# Altium PCB Power_Managment.PcbDoc (part 1 of 2)
Units mm, origin at the board's own origin, x right, y up, seen from the top; angles counter-clockwise.
Board outline 140 x 113 mm, 2 copper layers (Top Layer, Bottom Layer); 140 components, 107 nets, 489 pads, 1171 vias.
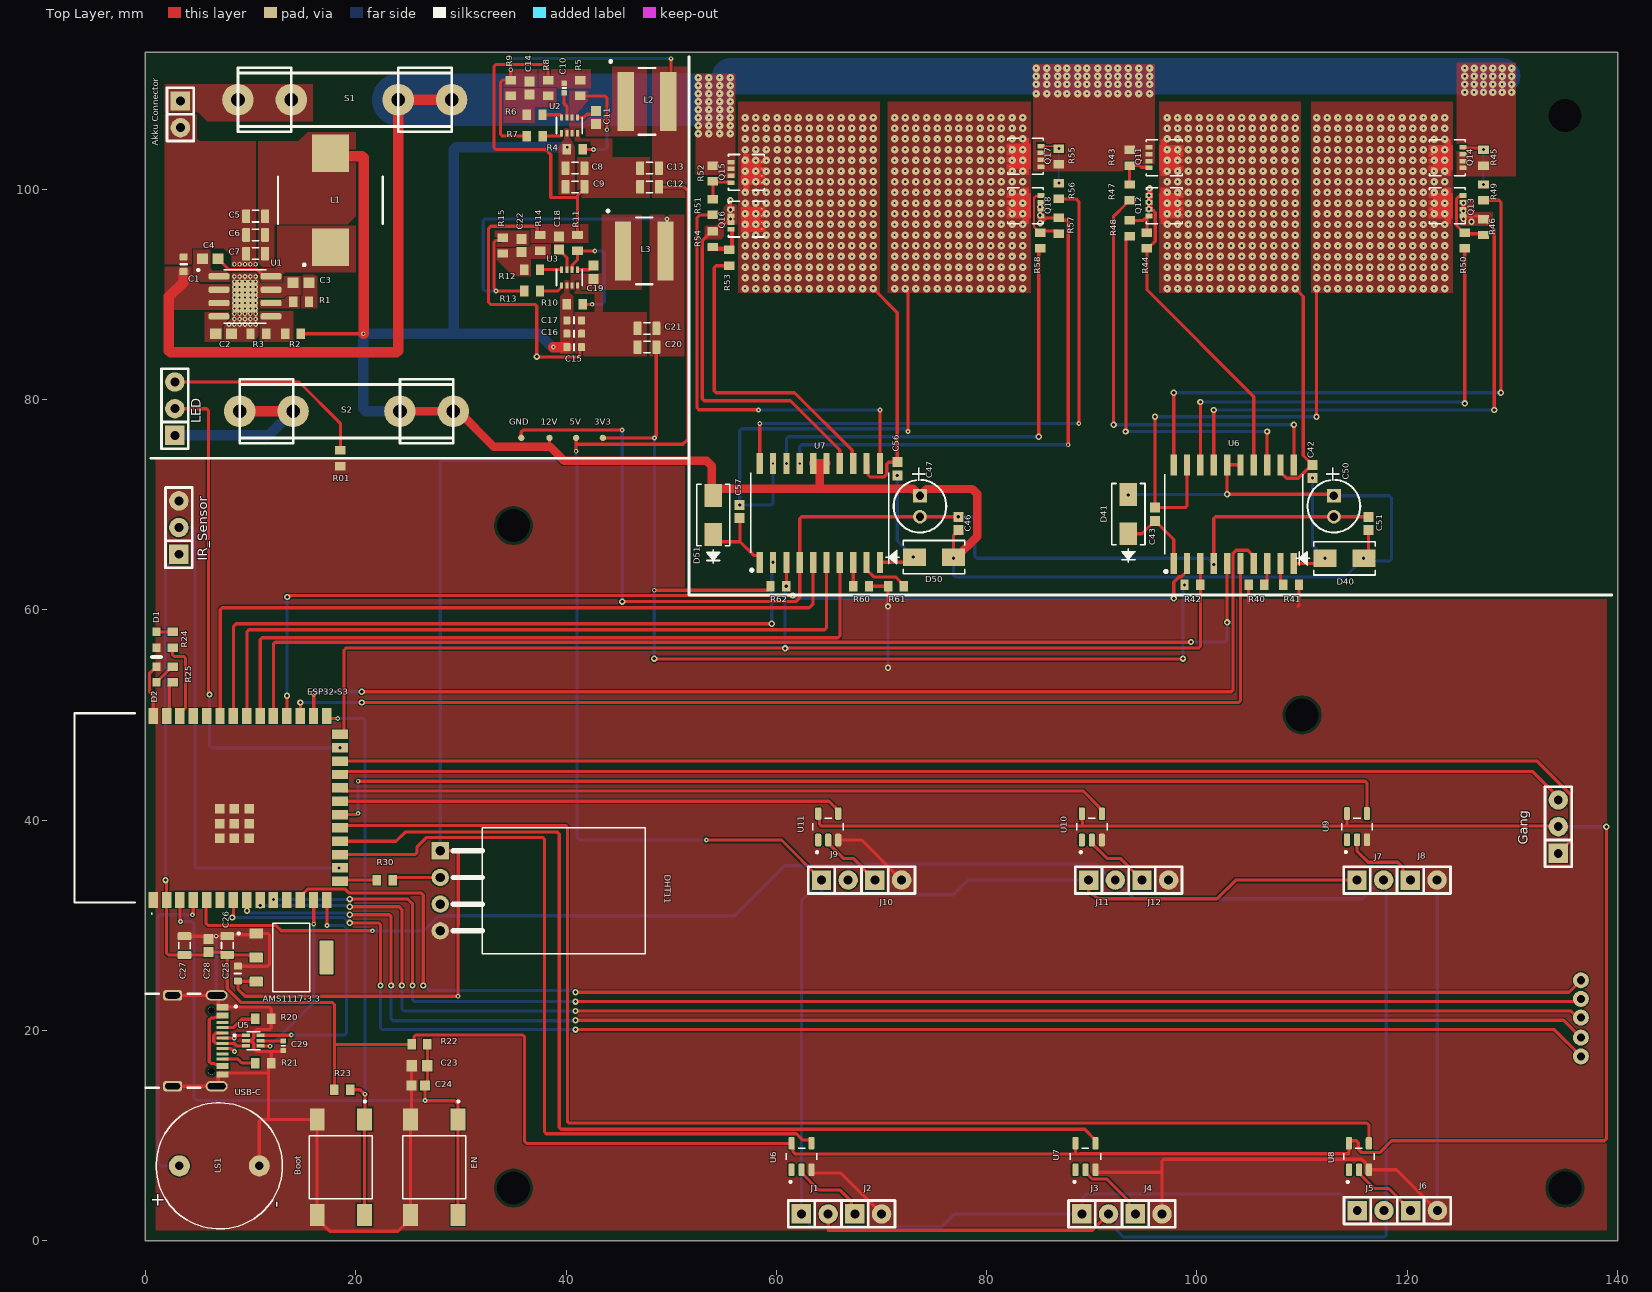
[diagram p0: Top Layer view]
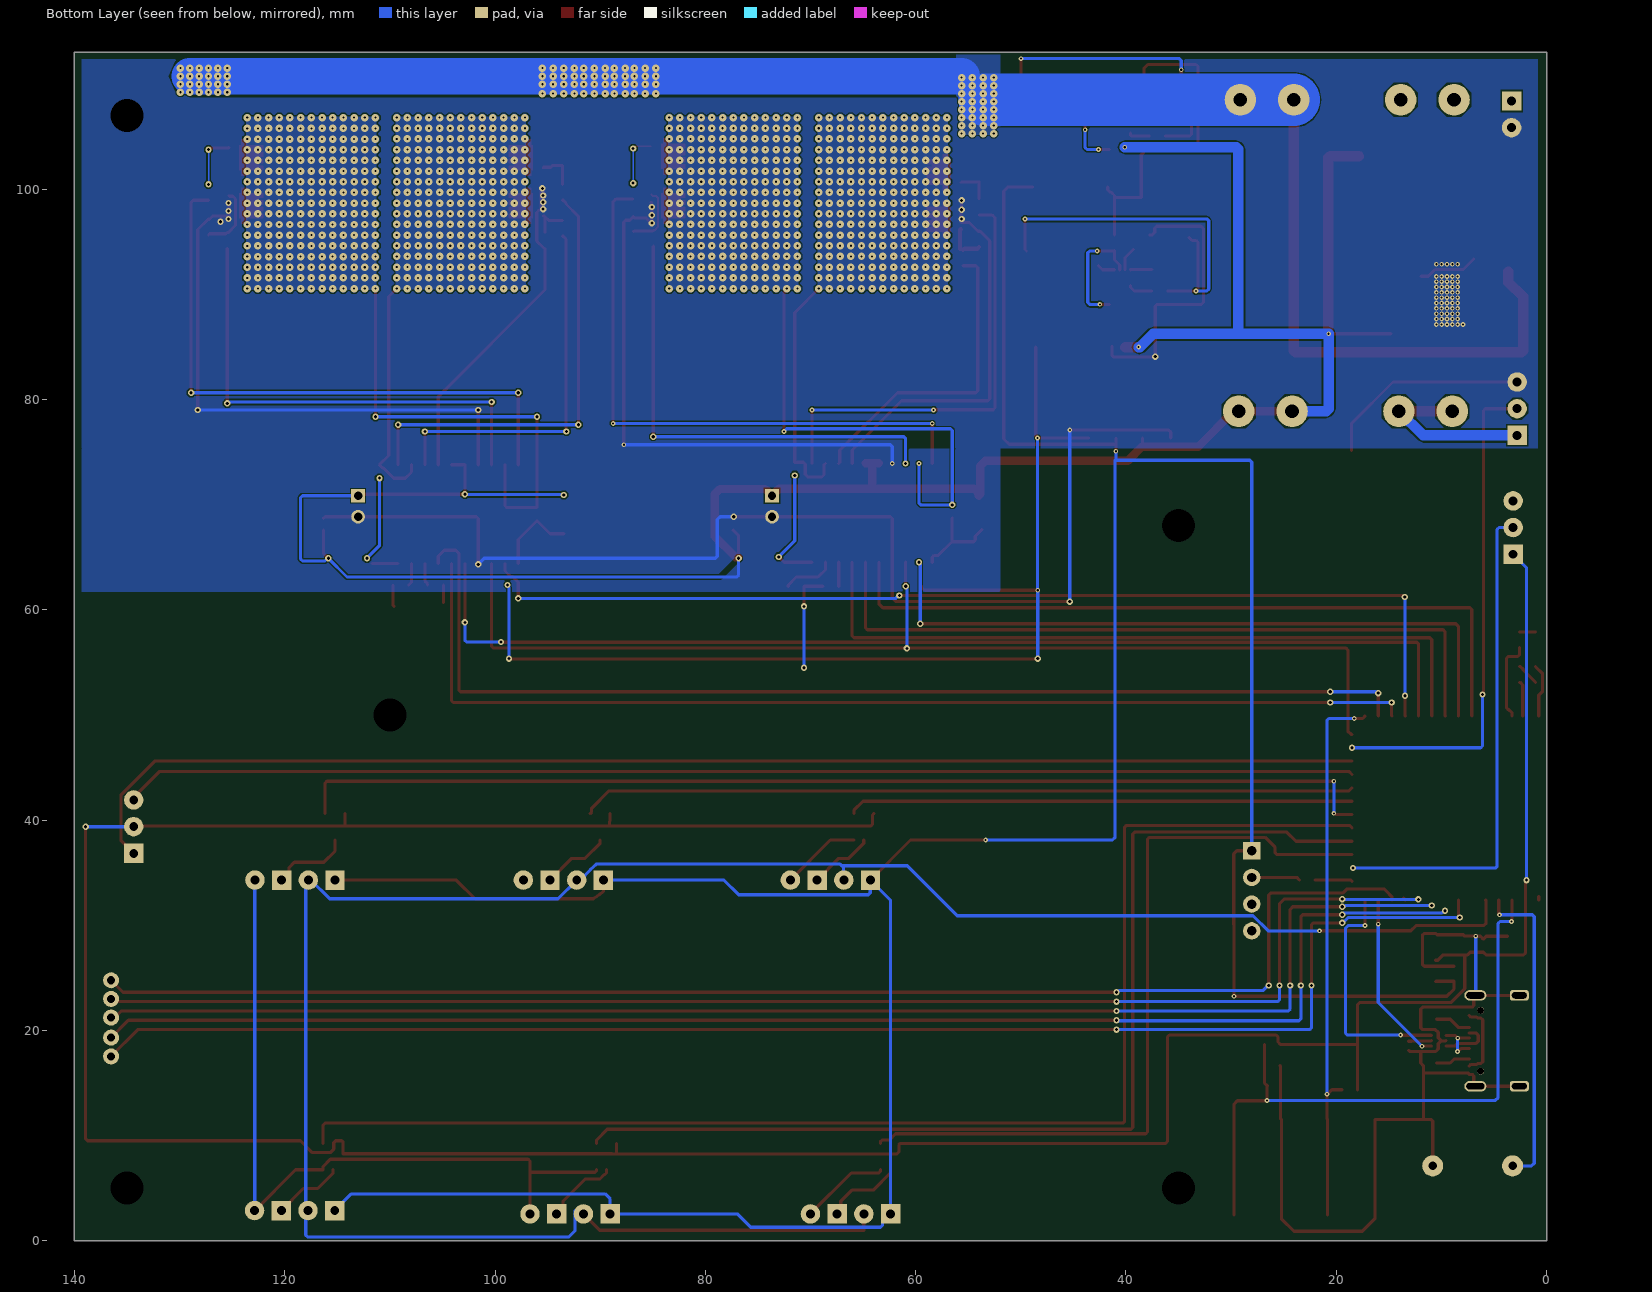
[diagram p1: Bottom Layer view, seen from below]
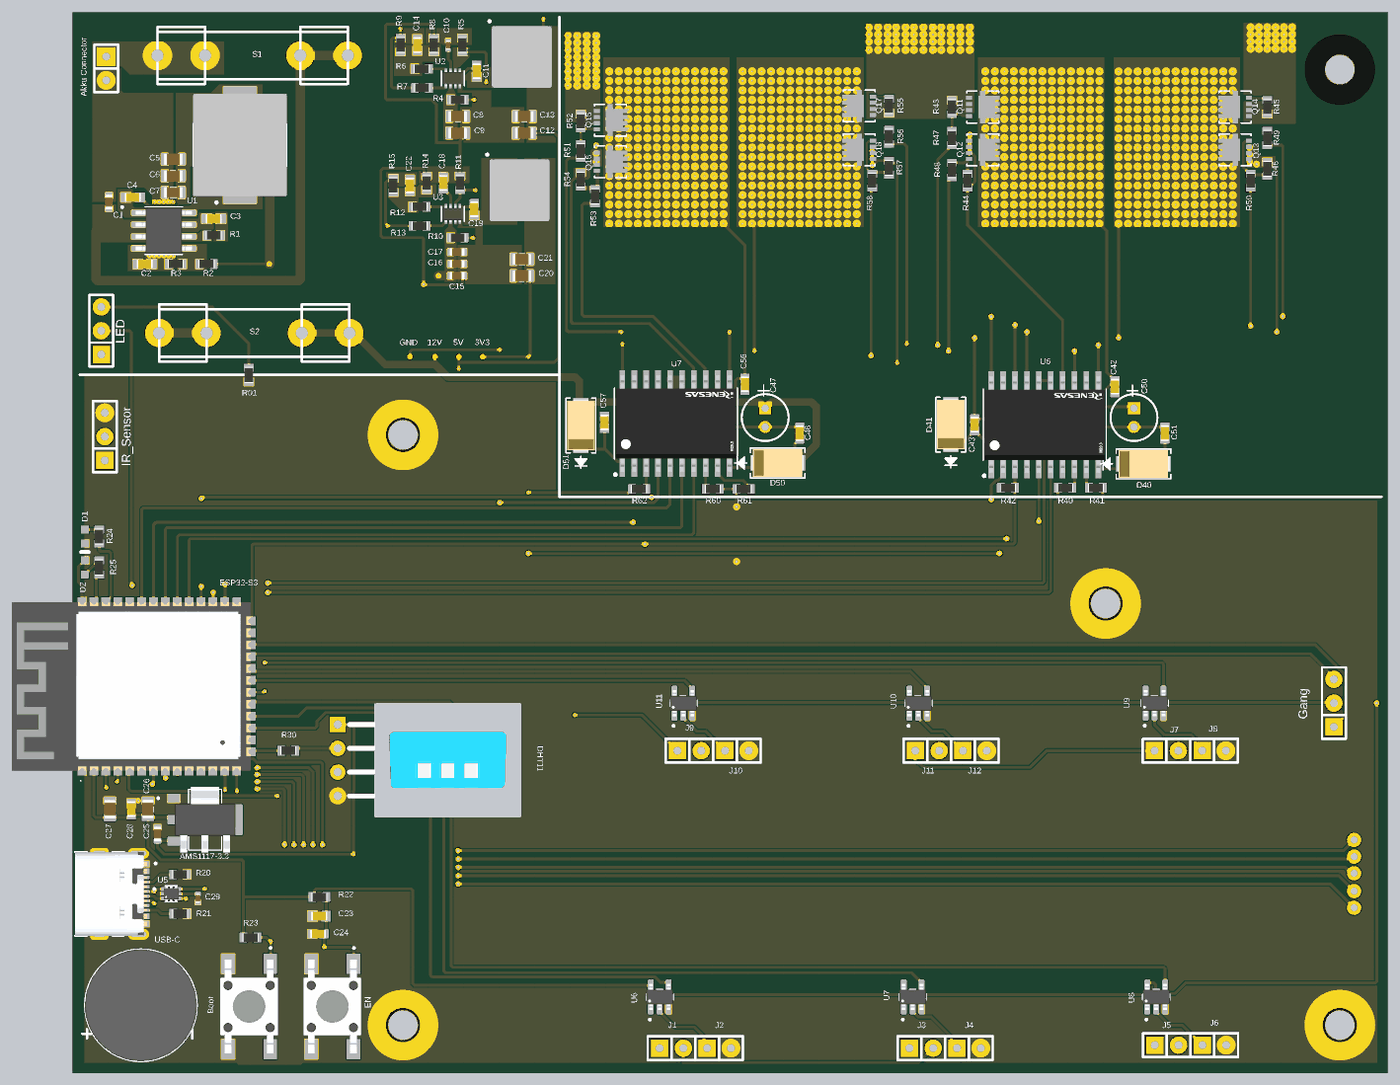
[diagram p3: 3D render of the assembled board from above, using the file's embedded part models]

## Layer stack, top to bottom
Top Solder: solder mask 0.0102, Solder Resist, Dk 3.5
Top Layer: signal copper 0.0356
Dielectric 1: dielectric 0.32, FR-4, Dk 4.8
Bottom Layer: signal copper 0.0356
Bottom Solder: solder mask 0.0102, Solder Resist, Dk 3.5

## Board outline
0,0 0,113 140,113 140,0

## Design rules (kind name [scope] priority, off if disabled: settings)
BoardOutlineClearance [All] p1: gap=0.2 ignorepadtopadclearanceinfootprint=FALSE
Clearance [All] p1: gap=0.127 ignorepadtopadclearanceinfootprint=FALSE except(0.25: Arc-Hole Track-Hole SMDPad-Hole THPad-Hole Via-Hole Fill-Hole Poly-Hole Region-Hole Text-Hole)
ComponentClearance [All] p1: gap=0.127 collisioncheckmode=3 verticalgap=0.127 showdistances=TRUE
DiffPairsRouting [All] p1: maxlimit=0.254 minlimit=0.127 mostfreqgap=0.127 toplayer_minwidth=0.127 toplayer_maxwidth=25.4 toplayer_prefwidth=0.127 bottomlayer_minwidth=0.127 bottomlayer_maxwidth=25.4 bottomlayer_prefwidth=0.127 maxuncoupledlength=12.7
Height [All] p1: minheight=0 maxheight=1816.048 prefheight=12.7
HoleSize [All] p1: absolutevalues=TRUE maxlimit=6.3 minlimit=0.2 maxpercent=80.000 minpercent=20.000
HoleToHoleClearance [All] p1: gap=0.25 allowstackedmicrovias=FALSE
MinimumAnnularRing [All] p1: minimumring=0.076
MinimumSolderMaskSliver [All] p1: minsoldermaskwidth=0
PasteMaskExpansion [All] p1: expansion=0.02
PlaneClearance [All] p1: clearance=0.127
PlaneConnect PlaneConnectPowerPads [InPadClass('PowerPads')] p1: planeconnectstyle=Direct reliefexpansion=0.508 reliefentries=4 reliefconductorwidth=0.254 reliefairgap=0.254
PlaneConnect [All] p2: planeconnectstyle=Direct reliefexpansion=0.3 reliefentries=4 reliefconductorwidth=0.127 reliefairgap=0.127
PolygonConnect PolygonConnectPowerPads [All vs (InPadClass('PowerPads'))] p1: connectstyle=Direct reliefconductorwidth=0.254 reliefentries=4 polygonreliefangle="90 Angle" airgapwidth=0.254
PolygonConnect [All] p2: connectstyle=Direct reliefconductorwidth=0.127 reliefentries=4 polygonreliefangle="90 Angle" airgapwidth=0.127
RoutingVias [All] p1: holewidth=0.3 width=0.6 viastyle="Through Hole" minholewidth=0.15 minwidth=0.25 maxholewidth=0.6 maxwidth=6.6
SilkToSilkClearance [All] p1: silktosilkclearance=0
SilkToSolderMaskClearance [IsPad] p1: minsilkscreentomaskgap=0.127 clearancetoexposedcopper=TRUE
SolderMaskExpansion [All] p1: expansion=0.075 istentingtop=FALSE
Width [All] p1: maxlimit=25.4 minlimit=0.1 preferedwidth=0.3 minimp=50.000000 maximp=50.000000 favimp=50.000000
19 further rules are at their usual default settings.

## Classes and differential pairs
component class Motortreiber: C42 C43 C46 C47 C50 C51 C56 C57 D40 D41 D50 D51 Q11 Q12 Q13 Q14 Q15 Q16 Q17 Q18 R40 R41 R42 R43 R44 R45 R46 R47 R48 R49 R50 R51 R52 R53 R54 R55 R56 R57 R58 R60 R61 R62 U6 U7
component class Sensors: DHT11 J1 J2 J3 J4 J5 J6 J7 J8 J9 J10 J11 J12 LS1 R30 U6 U7 U8 U9 U10 U11
component class Esp32-S3-Mainboard: AMS1117-3.3 Boot C23 C24 C25 C26 C27 C28 C29 D1 D2 EN ESP32-S3 Gang IR_Sensor R20 R21 R22 R23 R24 R25 U5 USB-C
component class Power_Management: 3V3 5V 12V "Akku Connector" C1 C2 C3 C4 C5 C6 C7 C8 C9 C10 C11 C12 C13 C14 C15 C16 C17 C18 C19 C20 C21 C22 GND L1 L2 L3 LED R01 R1 R2 R3 R4 R5 R6 R7 R8 R9 R10 R11 R12 R13 R14 R15 S1 S2 U1 U2 U3

## Components (designator, comment, footprint, x,y, rotation, side; value= is the part's Value field where it differs from the comment)
3V3 "TPAD6R" TP06R 43.502,76.346 r90 top
5V "TPAD6R" TP06R 40.962,76.346 r90 top
12V "TPAD6R" TP06R 38.422,76.346 r90 top
"Akku Connector" "CON2" SIP-2 3.322,107.116 r270 top
AMS1117-3.3 "AMS1117-3.3" SOT229P700X180-4N 13.876,26.924 r0 top
Boot "FSM2JSMLTR" SW_1571527-2 18.575,6.985 r270 top
C1 "Capacitor 10µF +/-20% 10V 0603" CAPC0603(1608)100_L 3.624,92.856 r270 top value=10µF
C2 "10nF" CAPC1608X94X35NL15T15 7.434,86.252 r180 top
C3 "2.7nF" CAPC1608X94X35NL15T15 14.8,91.078 r0 top
C4 "0.1uF" CAPC1608X94X35NL15T15 6.164,93.364 r180 top value=100nF
C5 "Capacitor 22µF +/-40% 16V 0805" CAPC0805(2012)145_L 10.482,97.428 r0 top value=22µF
C6 "Capacitor 22µF +/-40% 16V 0805" CAPC0805(2012)145_L 10.482,95.65 r0 top value=22µF
C7 "Capacitor 22µF +/-40% 16V 0805" CAPC0805(2012)145_L 10.482,93.872 r0 top value=22µF
C8 "Capacitor 22µF +/-40% 16V 0805" CAPC0805(2012)145_L 40.835,102 r180 top value=22µF
C9 "Capacitor 22µF +/-40% 16V 0805" CAPC0805(2012)145_L 40.835,100.222 r180 top value=22µF
C10 "Capacitor 22nF +/-20% 10V 0402" CAPC0402(1005)60_L 39.819,109.62 r270 top value=22nF
C11 "Capacitor 100 nF +/-10% 50 V 0603" CAPC1608X90X40NL10T20 42.867,106.826 r270 top value=100nF
C12 "Capacitor 22µF +/-40% 16V 0805" CAPC0805(2012)145_L 47.947,100.222 r0 top value=22µF
C13 "Capacitor 22µF +/-40% 16V 0805" CAPC0805(2012)145_L 47.947,102 r0 top value=22µF
C14 "Capacitor 100 nF +/-10% 50 V 0603" CAPC1608X90X40NL10T20 36.517,109.62 r90 top value=300pF
C15 "Capacitor 10µF +/-20% 10V 0603" CAPC0603(1608)100_L 40.773,84.982 r180 top value=10µF
C16 "Capacitor 10µF +/-20% 10V 0603" CAPC0603(1608)100_L 40.773,86.252 r180 top value=10µF
C17 "Capacitor 10µF +/-20% 10V 0603" CAPC0603(1608)100_L 40.773,87.522 r180 top value=10µF
C18 "Capacitor 100 nF +/-10% 50 V 0603" CAPC1608X90X40NL10T20 39.311,94.888 r270 top value=22nF
C19 "Capacitor 100 nF +/-10% 50 V 0603" CAPC1608X90X40NL10T20 42.613,92.094 r270 top value=100nF
C20 "Capacitor 22µF +/-40% 16V 0805" CAPC0805(2012)145_L 47.693,84.982 r0 top value=22µF
C21 "Capacitor 22µF +/-40% 16V 0805" CAPC0805(2012)145_L 47.693,86.76 r0 top value=22µF
C22 "Capacitor 100 nF +/-10% 50 V 0603" CAPC1608X90X40NL10T20 35.755,94.634 r270 top value=470pF
C23 "Capacitor 1uF +/- 10% 16V 0603" CAPC1608X90X35ML15T15 26.068,16.637 r180 top value=1µF
C24 "Capacitor 100 nF +/-10% 50 V 0603" CAPC1608X90X40NL10T20 25.941,14.732 r180 top value=100nF
C25 "Capacitor 10µF +/-20% 10V 0603" CAPC0603(1608)100_L 8.796,25.4 r270 top value=10µF
C26 "Capacitor 22µF +/-40% 16V 0805" CAPC0805(2012)145_L 7.78,28.067 r270 top value=22µF
C27 "Capacitor 22µF +/-40% 16V 0805" CAPC0805(2012)145_L 3.716,28.056 r270 top value=22µF
C28 "Capacitor 100 nF +/-10% 50 V 0603" CAPC1608X90X40NL10T20 6.002,28.057 r270 top value=100nF
C29 "Capacitor 100nF +/-20% 50V 0402" CAPC0402(1005)60_L 13.114,18.542 r90 top value=100nF
C42 "Capacitor 100 nF +/-10% 50 V 0603" CAPC1608X90X40NL10T20 110.998,73.152 r270 top value=0.22uF
C43 "Capacitor 100 nF +/-10% 50 V 0603" CAPC1608X90X40NL10T20 96.012,69.088 r270 top value=0.22uF
C46 "Capacitor 100 nF +/-10% 50 V 0603" CAPC1608X90X40NL10T20 77.343,68.189 r90 top value=100nF
C47 "ECA1HM100" CAPPR55-200-1100X500X1200 73.66,69.85 r270 top value=10µF
C50 "ECA1HM100" CAPPR55-200-1100X500X1200 113.03,69.85 r270 top value=10µF
C51 "Capacitor 100 nF +/-10% 50 V 0603" CAPC1608X90X40NL10T20 116.332,68.199 r90 top value=100nF
C56 "Capacitor 100 nF +/-10% 50 V 0603" CAPC1608X90X40NL10T20 71.501,73.406 r270 top value=0.22uF
C57 "Capacitor 100 nF +/-10% 50 V 0603" CAPC1608X90X40NL10T20 56.515,69.342 r270 top value=0.22uF
D1 "HSMG-C190" AVAG-HSMX-C190_V 1.049,57.15 r270 top
D2 "19-217/R6C-AL1M2VY/3T" EVRL-0603-2_V 1.049,53.848 r90 top
D40 "B170-13-F" SMA_DIO 114.046,64.897 r0 top
D41 "B170-13-F" SMA_DIO 93.472,69.088 r90 top
D50 "B170-13-F" SMA_DIO 75,65 r0 top
D51 "B170-13-F" SMA_DIO 54,69 r90 top
DHT11 "TEM-HUM-DHT11(4P-15.5X12.0MM)" SNR4-2.54-15.5X12.0X5.5MM 39.784,33.274 r0 top
EN "FSM2JSMLTR" SW_1571527-2 27.465,6.985 r270 top
ESP32-S3 "ESP32-S3-WROOM-1-N16R8" ESP32S3WROOM1N8R2 6,41.158 r90 top
Gang "CON3" Sip-3 134.366,39.37 r90 top
GND "TPAD6R" TP06R 35.745,76.348 r90 top
IR_Sensor "CON3" Sip-3 3.175,67.818 r90 top
J1 "CON2" SIP-2 63.66,2.54 r0 top
J2 "CON2" SIP-2 68.74,2.54 r0 top
J3 "CON2" SIP-2 90.33,2.54 r0 top
J4 "CON2" SIP-2 95.41,2.54 r0 top
J5 "CON2" SIP-2 116.52,2.86 r0 top
J6 "CON2" SIP-2 121.6,2.86 r0 top
J7 "CON2" SIP-2 116.492,34.29 r0 top
J8 "CON2" SIP-2 121.572,34.29 r0 top
J9 "CON2" SIP-2 65.565,34.29 r0 top
J10 "CON2" SIP-2 70.645,34.29 r0 top
J11 "CON2" SIP-2 90.965,34.29 r0 top
J12 "CON2" SIP-2 96.045,34.29 r0 top
L1 "10uH" MPL-AY1050 17.594,98.952 r90 top
L2 "6.8uH" MPL-AL6060 47.693,108.35 r0 top
L3 "6.8uH" MPL-AL6060 47.439,94.126 r0 top
LED "CON3" Sip-3 2.794,79.121 r90 top
LS1 "CMI-1295IC-0385T" CUI_CMI-1295IC-0385T 7.028,7.112 r90 top
Q11 "NVTFS5C670NLTAG" WDFN8_511AB_ONS 96.901,102.997 r0 top
Q12 "NVTFS5C670NLTAG" WDFN8_511AB_ONS 96.901,98.425 r0 top
Q13 "NVTFS5C670NLTAG" WDFN8_511AB_ONS 123.825,98.425 r180 top
Q14 "NVTFS5C670NLTAG" WDFN8_511AB_ONS 123.825,102.997 r180 top
Q15 "NVTFS5C670NLTAG" WDFN8_511AB_ONS 57.15,101.6 r0 top
Q16 "NVTFS5C670NLTAG" WDFN8_511AB_ONS 57.15,97.155 r0 top
Q17 "NVTFS5C670NLTAG" WDFN8_511AB_ONS 83.693,103.124 r180 top
Q18 "NVTFS5C670NLTAG" WDFN8_511AB_ONS 83.693,98.425 r180 top
R01 "Resistor 0R +/- 5% 0603 100 mW" RESC1608X55X25ML10T15 18.542,74.41 r90 top value=0
R1 "34.7k" RESC1608X55X25ML10T15 14.8,89.3 r0 top value=100k
R2 "115k" RESC1608X55X25ML10T15 14.038,86.252 r0 top
R3 "115k" RESC1608X55X25ML10T15 10.736,86.252 r180 top value=22.1k
R4 "Resistor 100k +/-1% 0603 100 mW" RESC1608X55X25ML10T15 40.835,103.778 r180 top value=191k
R5 "Resistor 100k +/-1% 0603 100 mW" RESC1608X55X25ML10T15 41.343,109.62 r270 top value=49.9k
R6 "Resistor 100k +/-1% 0603 100 mW" RESC1608X55X25ML10T15 37.013,107.08 r0 top value=10k
R7 "Resistor 100k +/-1% 0603 100 mW" RESC1608X55X25ML10T15 37.025,105.048 r0 top value=10k
R8 "Resistor 100k +/-1% 0603 100 mW" RESC1608X55X25ML10T15 38.295,109.62 r270 top value=10k
R9 "Resistor 100k +/-1% 0603 100 mW" RESC1608X55X25ML10T15 34.739,109.62 r270 top value=90.9k
R10 "Resistor 100k +/-1% 0603 100 mW" RESC1608X55X25ML10T15 40.835,89.046 r0 top value=191k
R11 "Resistor 100k +/-1% 0603 100 mW" RESC1608X55X25ML10T15 41.089,94.888 r90 top value=49.9k
R12 "Resistor 100k +/-1% 0603 100 mW" RESC1608X55X25ML10T15 36.771,92.348 r180 top value=10k
R13 "Resistor 100k +/-1% 0603 100 mW" RESC1608X55X25ML10T15 36.771,90.316 r180 top value=100k
R14 "Resistor 100k +/-1% 0603 100 mW" RESC1608X55X25ML10T15 37.533,94.888 r90 top value=9.09k
R15 "Resistor 100k +/-1% 0603 100 mW" RESC1608X55X25ML10T15 33.977,94.634 r90 top value=51k
R20 "Resistor 100k +/-1% 0603 100 mW" RESC1608X55X25ML10T15 11.209,21.082 r180 top value=5k1
R21 "Resistor 100k +/-1% 0603 100 mW" RESC1608X55X25ML10T15 11.209,16.891 r0 top value=5k1
R22 "Resistor 10k +/-1% 0603 100 mW" RESC1608X55X25ML10T15 26.068,18.669 r0 top value=10k
R23 "Resistor 10k +/-1% 0603 100 mW" RESC1608X55X25ML10T15 18.714,14.351 r0 top value=100
R24 "Resistor 10k +/-1% 0603 100 mW" RESC1608X55X25ML10T15 2.573,57.15 r90 top value=33
R25 "Resistor 10k +/-1% 0603 100 mW" RESC1608X55X25ML10T15 2.573,53.848 r90 top value=24
R30 "Resistor 10k +/-1% 0603 100 mW" RESC1608X55X25ML10T15 22.754,34.29 r180 top value=10k
R40 "Resistor 1k +/-1% 0603 100 mW" RESC1608X55X25ML10T15 105.664,62.357 r180 top value=1k
R41 "Resistor 1k +/-1% 0603 100 mW" RESC1608X55X25ML10T15 108.954,62.357 r0 top value=1k
R42 "Resistor 10k +/-1% 0603 100 mW" RESC1608X55X25ML10T15 99.568,62.357 r0 top value=10k
R43 "Resistor 100k +/-1% 0603 100 mW" RESC1608X55X25ML10T15 93.599,102.997 r90 top value=100k
R44 "Resistor 100k +/-1% 0603 100 mW" RESC1608X55X25ML10T15 95.25,95.123 r270 top value=100k
R45 "Resistor 100k +/-1% 0603 100 mW" RESC1608X55X25ML10T15 127.254,102.997 r270 top value=100k
R46 "Resistor 100k +/-1% 0603 100 mW" RESC1608X55X25ML10T15 127.254,96.393 r90 top value=100k
R47 "Resistor 100k +/-1% 0603 100 mW" RESC1608X55X25ML10T15 93.599,99.695 r90 top value=10
R48 "Resistor 100k +/-1% 0603 100 mW" RESC1608X55X25ML10T15 93.599,96.278 r90 top value=10
R49 "Resistor 100k +/-1% 0603 100 mW" RESC1608X55X25ML10T15 127.254,99.695 r270 top value=10
R50 "Resistor 100k +/-1% 0603 100 mW" RESC1608X55X25ML10T15 125.476,95.123 r270 top value=10
R51 "Resistor 100k +/-1% 0603 100 mW" RESC1608X55X25ML10T15 53.975,98.31 r90 top value=10
R52 "Resistor 100k +/-1% 0603 100 mW" RESC1608X55X25ML10T15 53.975,101.485 r90 top value=100k
R53 "Resistor 100k +/-1% 0603 100 mW" RESC1608X55X25ML10T15 55.499,93.472 r90 top value=10
R54 "Resistor 100k +/-1% 0603 100 mW" RESC1608X55X25ML10T15 53.975,95.25 r90 top value=100k
R55 "Resistor 100k +/-1% 0603 100 mW" RESC1608X55X25ML10T15 86.868,103.112 r270 top value=100k
R56 "Resistor 100k +/-1% 0603 100 mW" RESC1608X55X25ML10T15 86.868,99.822 r270 top value=10
R57 "Resistor 100k +/-1% 0603 100 mW" RESC1608X55X25ML10T15 86.868,96.52 r90 top value=100k
R58 "Resistor 100k +/-1% 0603 100 mW" RESC1608X55X25ML10T15 85.09,95.123 r270 top value=10
R60 "Resistor 1k +/-1% 0603 100 mW" RESC1608X55X25ML10T15 68.06,62.23 r0 top value=1k
R61 "Resistor 1k +/-1% 0603 100 mW" RESC1608X55X25ML10T15 71.374,62.23 r180 top value=1k
R62 "Resistor 10k +/-1% 0603 100 mW" RESC1608X55X25ML10T15 60.198,62.23 r0 top value=10k
S1 "SICHERUNG" SICHERUNG 18.959,108.496 r0 top
S2 "SICHERUNG" SICHERUNG 19.118,78.886 r180 top
U1 "AP64501SP-13" SOIC127P600X170-9N 9.466,89.808 r0 top
U2 "MP2338GTL-Z" SOT583_MP2338_MNP 40.327,106.064 r90 top
U3 "MP2338GTL-Z" SOT583_MP2338_MNP 40.327,91.586 r90 top
U5 "USBLC6-2P6" SOT50P160X60-6N 10.265,19.021 r0 top
U6 "HIP4081AIBZ" M20_3_MFG 103.505,69.089 r90 top
U6 "SN74LV1T34DBVR" SOT95P280X145-5N 62.4,8 r90 top
U7 "HIP4081AIBZ" M20_3_MFG 64.135,69.215 r90 top
U7 "SN74LV1T34DBVR" SOT95P280X145-5N 89.4,8 r90 top
U8 "SN74LV1T34DBVR" SOT95P280X145-5N 115.4,8 r90 top
U9 "SN74LV1T34DBVR" SOT95P280X145-5N 115.222,39.37 r90 top
U10 "SN74LV1T34DBVR" SOT95P280X145-5N 90.01,39.355 r90 top
U11 "SN74LV1T34DBVR" SOT95P280X145-5N 64.93,39.355 r90 top
USB-C "USB4105GFA120" GCT_USB4105GFA120 2.589,19.009 r270 top

## Footprints (in the part's own frame and the unit in brackets; to place one, negate y for a bottom-side part, rotate by r counter-clockwise, add the part's x,y. Pads: shape width x height; smd on the part's side, far side on the other; paste and mask are expansions set on the pad)
AVAG-HSMX-C190_V [mm] "SMD, 2-Leads, Body 1.6x0.8mm, Height 0.9mm"
  rect 0.8x0.8 smd: 1(-0.75,0) 2(0.75,0)
  silkscreen extent 1.65,-0.4 1.65,0.4, body extent -0.8,-0.4 0.8,0.4, height 0.9
CAPC0402(1005)60_L [mm] "Chip Capacitor, Body 1.0x0.5mm, Height 0.6mm, IPC High Density"
  rrect25% 0.5x0.55 smd: 1(-0.45,0) 2(0.45,0)
  silkscreen extent 0,-0.2 0,0.2, body extent -0.5,-0.25 0.5,0.25, height 0.6
CAPC0603(1608)100_L [mm] "Chip Capacitor, Body 1.6x0.8mm, Height 1.0mm, IPC High Density"
  rrect25% 0.66x0.76 smd: 1(-0.7,0) 2(0.7,0)
  silkscreen extent 0,-0.3 0,0.3, body extent -0.8,-0.4 0.8,0.4, height 0.95
CAPC0805(2012)145_L [mm] "Chip Capacitor, Body 2.0x1.2mm, Height 1.45mm, IPC High Density"
  rrect25% 0.76x1.3 smd: 1(-0.9,0) 2(0.89,0)
  silkscreen extent -0.3,-0.55 0.3,0.55, body extent -1,-0.6 1,0.6, height 1.45
CAPC1608X90X35ML15T15 [mm] "Chip Capacitor, 2-Leads, Body 1.75x0.95mm, IPC Low Density"
  rect 1x1.1 smd: 1(-0.725,0) 2(0.725,0)
  body extent -0.87,-0.48 0.87,0.48, height 0.9
CAPC1608X90X40NL10T20 [mm] "Chip Capacitor, 2-Leads, Body 1.70x0.90mm, IPC Medium Density"
  rect 0.95x0.95 smd: 1(-0.625,0) 2(0.625,0)
  body extent -0.85,-0.45 0.85,0.45, height 0.9
CAPC1608X94X35NL15T15 [mm] "Chip Capacitor, 2-Leads, Body 1.75x0.96mm, IPC Medium Density"
  rect 1.05x1 smd: 1(-0.75,0) 2(0.75,0)
  body extent -0.87,-0.48 0.87,0.48, height 0.94
CAPPR55-200-1100X500X1200 [mm] "THD, 2-Leads, Dia 5mm, Pin Spacing 2mm"
  rect 1.3x1.3 hole 0.8: 1(-1,0)
  round 1.3 hole 0.8: 2(1,0)
  silkscreen extent -2.5,-2.5 2.5,2.5, body extent -2.5,-2.5 2.45,2.5, height 12
CUI_CMI-1295IC-0385T [mm]
  round 2 hole 0.8: N(0,-3.8) P(0,3.8)
  silkscreen extent -6,-6 6,6, body extent -6,-6 6,6, height 9
ESP32S3WROOM1N8R2 [mm]
  rect 1.5x0.9 smd: 1(-8.75,5.26) 2(-8.75,3.99) 3(-8.75,2.72) 4(-8.75,1.45) 5(-8.75,0.18) 6(-8.75,-1.09) 7(-8.75,-2.36) 8(-8.75,-3.63) 9(-8.75,-4.9) 10(-8.75,-6.17) 11(-8.75,-7.44) 12(-8.75,-8.71) 13(-8.75,-9.98) 14(-8.75,-11.25) 27(8.75,-11.25) 28(8.75,-9.98) 29(8.75,-8.71) 30(8.75,-7.44) 31(8.75,-6.17) 32(8.75,-4.9) 33(8.75,-3.63) 34(8.75,-2.36) 35(8.75,-1.09) 36(8.75,0.18) 37(8.75,1.45) 38(8.75,2.72) 39(8.75,3.99) 40(8.75,5.26)
  rect 0.9x1.5 smd: 15(-6.985,-12.5) 16(-5.715,-12.5) 17(-4.445,-12.5) 18(-3.175,-12.5) 20(-0.635,-12.5) 21(0.635,-12.5) 22(1.905,-12.5) 23(3.175,-12.5) 24(4.445,-12.5) 25(5.715,-12.5) 26(6.985,-12.5)
  rect 0.9x1.5 smd paste+0.05: 19(-1.905,-12.5)
  rect 0.9x0.9 smd: 41(-1.5,-2.46) 42(-1.5,-1.06) 43(-2.9,-1.06) 44(-2.9,-2.46) 45(-2.9,-3.86) 46(-1.5,-3.86) 47(-0.1,-3.86) 48(-0.1,-2.46) 49(-0.1,-1.06)
  silkscreen extent -10.1,5.35 9,12.75, body extent -9,-12.75 9,12.75, height 3.25
EVRL-0603-2_V [mm] "SMD, 2-Leads, Body 1.6x0.8mm"
  rect 0.8x0.8 smd: 1(-0.75,0) 2(0.75,0)
  silkscreen extent 1.65,-0.4 1.65,0.4, body extent -0.8,-0.4 0.8,0.4, height 0.5
GCT_USB4105GFA120 [mm]
  rect 0.6x1.15 smd: A1_B12(-3.2,4.755) A4_B9(-2.4,4.755) B1_A12(3.2,4.755) B4_A9(2.4,4.755)
  rect 0.3x1.15 smd: A5(-1.25,4.755) A6(-0.25,4.755) A7(0.25,4.755) A8(1.25,4.755) B5(1.75,4.755) B6(0.75,4.755) B7(-0.75,4.755) B8(-1.75,4.755)
  oval 1x2.1 hole 0.6 slot 1.7 at 90 deg: SH1(-4.32,4.18) SH2(4.32,4.18)
  rrect50% 1x1.8 hole 0.6 slot 1.4 at 90 deg: SH3(-4.32,0) SH4(4.32,0)
  round 0.65 hole 0.65 unplated: ""(-2.89,3.68) ""(2.89,3.68)
  silkscreen extent -4.47,-2.6 4.47,6.1, body extent -4.47,-2.6 4.47,5.11, height 3.31
M20_3_MFG [mm] "Recommended Land Pattern"
  rect 2x0.6 smd paste+0 mask+0: 1(-4.7,5.715) 2(-4.7,4.445) 3(-4.7,3.175) 4(-4.7,1.905) 5(-4.7,0.635) 6(-4.7,-0.635) 7(-4.7,-1.905) 8(-4.7,-3.175) 9(-4.7,-4.445) 10(-4.7,-5.715) 11(4.7,-5.715) 12(4.7,-4.445) 13(4.7,-3.175) 14(4.7,-1.905) 15(4.7,-0.635) 16(4.7,0.635) 17(4.7,1.905) 18(4.7,3.175) 19(4.7,4.445) 20(4.7,5.715)
  silkscreen extent -5.57,-6.56 3.8,6.59, body extent -5.16,-6.4 5.16,6.4, height 2.65
MPL-AL6060 [mm] "Chip Inductor, 2-Leads, Body 6.60x6.40mm, IPC Medium Density"
  rect 1.55x5.6 smd: 1(-2.025,0) 2(2.025,0)
  silkscreen extent -3.55,-3.17 0.8,3.9, body extent -3.2,-3.3 3.2,3.3, height 4.8
MPL-AY1050 [mm] "Chip Inductor, 2-Leads, Body 11.00x10.00mm, IPC Medium Density"
  rect 3.55x3.5 smd: 1(-4.475,0) 2(4.475,0)
  silkscreen extent -6.25,-4.97 2.25,4.97, body extent -5.5,-5 5.5,5, height 4.8
RESC1608X55X25ML10T15 [mm] "Chip Resistor, 2-Leads, Body 1.70x0.90mm, IPC Low Density"
  rect 0.8x1 smd: 1(-0.75,0) 2(0.75,0)
  body extent -0.85,-0.45 0.85,0.45, height 0.55
SICHERUNG [mm]
  round 3 hole 1.3: 1(-10.163,0.008) 1(-5.083,0.008) 2(5.077,0.008) 2(10.157,0.008)
  silkscreen extent -10.16,-3.04 10.16,3.06
SIP-2 [mm]
  rect 1.85x1.85 hole 0.85: 1(-1.27,0)
  round 1.85 hole 0.85: 2(1.27,0)
  silkscreen extent -2.54,-1.27 2.54,1.27
Sip-3 [mm]
  rect 1.85x1.85 hole 0.85: 1(-2.54,0)
  round 1.85 hole 0.85: 2(0,0) 3(2.54,0)
  silkscreen extent -3.81,-1.27 3.81,1.27
SMA_DIO [mm]
  rect 2.18x1.63 smd paste+0 mask+0: 1(-1.857,0) 2(1.857,0)
  silkscreen extent -4.57,-1.59 2.92,1.59, body extent -2.8,-1.46 2.8,1.46, height 2.35
SNR4-2.54-15.5X12.0X5.5MM [mil]
  rect 65x65 / inner round 65 / far side rect 65x65 hole 35: 1(-462.6,150)
  round 65 hole 35: 2(-462.6,50) 3(-462.6,-50) 4(-462.6,-150)
  silkscreen extent -413,-236 305,236, body extent -246,-118 246,118, height 630
SOIC127P600X170-9N [mm]
  rrect50% 1.97x0.6 smd: 1(-2.475,1.905) 2(-2.475,0.635) 3(-2.475,-0.635) 4(-2.475,-1.905) 5(2.475,-1.905) 6(2.475,-0.635) 7(2.475,0.635) 8(2.475,1.905)
  rect 2.41x3.076 smd: 9(0,0)
  silkscreen extent -4.54,-2.55 2,2.6, body extent -3,-2.45 3,2.45, height 1.7
SOT50P160X60-6N [mm]
  rrect8% 0.75x0.35 smd mask+0.13: 1(-0.69,0.5) 2(-0.69,0) 3(-0.69,-0.5) 4(0.69,-0.5) 5(0.69,0) 6(0.69,0.5)
  silkscreen extent -1.9,-0.85 0.65,0.85, body extent -0.8,-0.8 0.8,0.8, height 0.6
SOT95P280X145-5N [mm]
  rrect50% 1.21x0.59 smd: 1(-1.255,0.95) 2(-1.255,0) 3(-1.255,-0.95) 4(1.255,-0.95) 5(1.255,0.95)
  silkscreen extent -2.51,-1.45 0.8,1.45, body extent -1.4,-1.45 1.4,1.45, height 1.45
SOT229P700X180-4N [mm]
  rrect15% 1.31x0.93 smd: 1(-3.345,2.29) 2(-3.345,0) 3(-3.345,-2.29)
  rrect15% 1.31x3.24 smd: 4(3.345,0)
  silkscreen extent -5.1,-3.25 1.75,3.25, body extent -3.25,-3.5 3.25,3.5, height 1.8
SOT583_MP2338_MNP [mm]
  rect 0.606x0.279 smd paste+0 mask+0: 1(-0.748,0.75) 2(-0.748,0.25) 3(-0.748,-0.25) 4(-0.748,-0.75) 5(0.748,-0.75) 6(0.748,-0.25) 7(0.748,0.25) 8(0.748,0.75)
  silkscreen extent -0.77,-1.23 0.77,1.23, body extent -0.85,-1.1 0.85,1.1, height 0.56
SW_1571527-2 [mm]
  rect 2.1x1.4 smd: 1(-4.55,2.25) 2(4.55,2.25) 3(-4.55,-2.25) 4(4.55,-2.25)
  silkscreen extent -6.35,-3 3,3, body extent -5,-3 5,3, height 4.59
TP06R [mm] "Testpoint, round, d=0.6mm"
  round 0.6 smd paste-1: 1(0,0)
WDFN8_511AB_ONS [mm]
  rect 0.66x0.432 smd paste+0 mask+0: 1(-1.47,0.975) 2(-1.47,0.325) 3(-1.47,-0.325) 4(-1.47,-0.975)
  rect 0.127x0.127 smd paste-0.064 mask-0.064: 5(1.47,-0.975) 6(1.47,-0.325) 7(1.47,0.325) 8(1.47,0.975)
  Top Layer region: -0.319,1.191 -0.319,1.73 0.25,1.73 0.25,1.191 1.8,1.191 1.8,0.759 1.33,0.759 1.33,0.541 1.8,0.541 1.8,0.109 1.33,0.109 1.33,-0.109 1.8,-0.109 1.8,-0.541 1.33,-0.541 1.33,-0.759 1.8,-0.759 1.8,-1.191 0.25,-1.191 0.25,-1.73 -0.319,-1.73 -0.319,-1.191 -0.5,-1.191 -0.5,1.191
  silkscreen extent -1.7,-1.7 1.7,1.7

## Part data
3V3 5V 12V GND: library part CMP-00028-00002-2, "0.6mm round", Pins=1
"Akku Connector" Gang IR_Sensor J1 J2 J3 J4 J5 J6 J7 J8 J9 J10 J11 J12 LED: "Stecker"
AMS1117-3.3: "LDO Voltage Regulators 800MA LDO LINEAR REG", Package="SOT-223 Seeed Technology", Check_prices=https://www.snapeda.com/parts/AMS1117-3.3/ams/view-part/?ref=eda, MF="ams AG", MP=AMS1117-3.3, SnapEDA_Link=https://www.snapeda.com/parts/AMS1117-3.3/ams/view-part/?ref=snap
Boot EN: library part CMP-016-000000-1, "Switch Tactile OFF (ON) SPST Round Button Gull Wing 0.05A 24VDC 0.98N SMD T/R", Package=None, Check_prices=https://www.snapeda.com/parts/FSM2JSMLTR/TE+Connectivity+ALCOSWITCH+Switches/view-part/?ref=eda, Design Item ID=FSM2JSMLTR, MF="TE Connectivity", MP=FSM2JSMLTR, SnapEDA_Link=https://www.snapeda.com/parts/FSM2JSMLTR/TE+Connectivity+ALCOSWITCH+Switches/view-part/?ref=snap, Source=FSM2JSMLTR.SchLib
C1 C15 C16 C17 C25: library part CMP-001-00075-4, "Chip Capacitor, 10µF +/-20%, 10V, 0603, Thickness 1 mm", Case/Package=0603, Max Operating Temperature=85°C, Min Operating Temperature=-55°C, Tolerance=10%, Voltage Rating=10V, Mounting Technology=SMT, Pins=2
C2 C3 C4: library part CMP-001-00003-6, "Chip Capacitor, 1 uF, +/- 10%, 16 V, 0603 (1608 Metric)", Capacitor Type=Ceramic, Case/Package=0603, Max Operating Temperature=125°C, Min Operating Temperature=-55°C, Tolerance=10%, Voltage Rating=16V, Mounting Technology=SM, Pins=2, RoHS Compliant=True
C5 C6 C7 C8 C9 C12 C13 C20 C21 C26 C27: library part CMP-001-00081-4, "Chip Capacitor, 22µF +/-40%, 16V, 0805, Thickness 1.45 mm", Case/Package=0805, Max Operating Temperature=85°C, Min Operating Temperature=-55°C, Tolerance=5%, Voltage Rating=16V, Mounting Technology=SMT, Pins=2
C10: library part CMP-001-00062-3, "Chip Capacitor, 22nF +/-20%, 10V, 0402, Thickness 0.6 mm", Case/Package=0402, Max Operating Temperature=85°C, Min Operating Temperature=-55°C, Tolerance=10%, Voltage Rating=10V, Mounting Technology=SMT, Pins=2
C11 C14 C18 C19 C22 C24 C28 C42 C43 C46 C51 C56 C57: library part CMP-001-00017-6, "Chip Capacitor, 100 nF, +/- 10%, 50 V, 0603 (1608 Metric)", Capacitor Type=Ceramic, Case/Package=0603, Max Operating Temperature=125°C, Min Operating Temperature=-55°C, Tolerance=10%, Voltage Rating=50V, Mounting Technology=SM, Pins=2, RoHS Compliant=True
C23: library part CMP-001-00004-6, "Chip Capacitor, 1 uF, +/- 10%, 16 V, 0603 (1608 Metric)", Capacitor Type=Ceramic, Case/Package=0603, Max Operating Temperature=125°C, Min Operating Temperature=-55°C, Tolerance=10%, Voltage Rating=16V, Mounting Technology=SM, Pins=2, RoHS Compliant=True
C29: library part CMP-001-00067-3, "Chip Capacitor, 100nF +/-20%, 50V, 0402, Thickness 0.6 mm", Case/Package=0402, Max Operating Temperature=85°C, Min Operating Temperature=-55°C, Tolerance=10%, Voltage Rating=50V, Mounting Technology=SMT, Pins=2
C47 C50: library part CMP-001-00025-7, "Aluminum Electrolytic Capacitor, 10 uF, +/- 20%, 50 V, -40 to 85 degC, 2-Pin THD, RoHS, Bulk", Capacitor Type=Electrolytic, Case/Package=Radial, Manufacturer=Panasonic, Max Operating Temperature=85°C, Min Operating Temperature=-40°C, Package Description="2-Pin Radial Lead, Dia 5 mm, Height 12 mm", Package Quantity=200, Package Reference=CAPPR55-200-1100X500X1200, Ripple Current=65mA, Tolerance=20%, Voltage Rating=50V, Datasheet URL=https://industrial.panasonic.com/cdbs/www-data/pdf/RDF0000/ABA0000C1218.pdf, Datasheet Version="Rev. 05, 10/2016", Diameter=5mm, Lead Pitch=2mm, Manufacturer URL=http://www.panasonic.com/, Mounting Technology=TH, Packaging=Bulk, Pins=2, Ripple Current (AC)=65mA, RoHS Compliant=True
D1: library part CMP-007-00013-2, "LED Uni-Color Green, 52 mW, 20 mA, -40 to 85 degC, 2-Pin SMD, RoHS, Tape and Reel", Case/Package=0603, Colour=Green, Forward Current=20mA, Forward Voltage=2.2V, Manufacturer=Avago, Max Operating Temperature=85°C, Min Operating Temperature=-40°C, Package Description="2-Pin Surface Mount Device, Body 1.6 x 0.8 mm, Height 0.9 mm", Package Quantity=4000, Package Reference=HSMX-C190, Power=52mW, Datasheet URL=http://docs.avagotech.com/docs/AV02-0551EN, Datasheet Version=Mar-12, Illumination Colour=Green, Lens Style=Diffused, Luminous Intensity=15mcd, Manufacturer URL=http://www.avagotech.com/, Mounting Technology=SM, Nominal Vf=2.2V, Packaging=TapeandReel, Pins=2, RoHS Compliant=True, Viewing Angle=170degrees
D2: library part CMP-007-00004-2, "Chip LED, Red, 5 V, 25 mA, -40 to 85 degC, 2-Pin SMD (0603), RoHS, Tape and Reel", Case/Package=0603, Colour=Red, Forward Voltage=2.2V, Manufacturer="Everlight Electronics", Package Description="2-Pin Surface Mount Device, Body 1.6 x 0.8 mm", Datasheet URL=https://datasheet.ciiva.com/4688/el-19-217-r6c-al1m2vy-3tpdf-187026-4688713.pdf, Datasheet Version="Rev. 1, 01/2005", Lens Style=Clear, Manufacturer URL=http://www.everlight.com/, Mounting Technology=SM, Package Reference=0603, RoHS Compliant=False
D40 D41 D50 D51: "No Description Available", Manufacturer_Name="Diodes Inc", Copyright="Copyright (C) 2025 Ultra Librarian. All rights reserved.", Manufacturer_Part_Number=B170-13-F
DHT11: "Äá»™ áº©m, nhiá»‡t Ä‘á»™ Ká»¹ thuáº­t sá»‘ Â±5% RH qua lá»—", Package=None, Check_prices=https://www.snapeda.com/parts/DHT11/UNIVERSAL-SOLDER+Electronics+Ltd/view-part/?ref=eda, MF="UNIVERSAL-SOLDER Electronics Ltd", MP=DHT11, SnapEDA_Link=https://www.snapeda.com/parts/DHT11/UNIVERSAL-SOLDER+Electronics+Ltd/view-part/?ref=snap
ESP32-S3: "Bluetooth, WiFi 802.11b/g/n, Bluetooth v5.0 Transceiver Module 2.4GHz PCB Trace Surface Mount", Package="NON STANDARD Espressif Systems", Check_prices=https://www.snapeda.com/parts/ESP32-S3-WROOM-1-N16R8/Espressif+Systems/view-part/?ref=eda, MF="Espressif Systems", MP=ESP32-S3-WROOM-1-N16R8, SnapEDA_Link=https://www.snapeda.com/parts/ESP32-S3-WROOM-1-N16R8/Espressif+Systems/view-part/?ref=snap
L1 L2 L3: library part Component_1
LS1: "12 mm, 3 Vdc, 85 dB, Through Hole, Driving Circuit, Magnetic Audio Indicator Buzzer", Package=Package, Check_prices=https://www.snapeda.com/parts/CMI-1295IC-0385T/Same+Sky/view-part/?ref=eda, MF="Same Sky", MP=CMI-1295IC-0385T, SnapEDA_Link=https://www.snapeda.com/parts/CMI-1295IC-0385T/Same+Sky/view-part/?ref=snap
Q11 Q12 Q13 Q14 Q15 Q16 Q17 Q18: "No Description Available", Manufacturer_Name=onsemi, Copyright="Copyright (C) 2025 Ultra Librarian. All rights reserved.", Manufacturer_Part_Number=NVTFS5C670NLTAG, RefDes=RefDes, Type=Type
R01: library part CMP-009-00006-5, "Chip Resistor, 0 Ohm, 0.1 W, -55 to 155 degC, 0603 (1608 Metric)", Case/Package=0603, Max Operating Temperature=155°C, Min Operating Temperature=-55°C, Power=100mW, Tolerance=5%, Voltage Rating=50V, Mounting Technology=SM, Pins=2, RoHS Compliant=True
R1 R2 R3 R4 R5 R6 R7 R8 R9 R10 R11 R12 R13 R14 R15 R20 R21 R43 R44 R45 R46 R47 R48 R49 R50 R51 R52 R53 R54 R55 R56 R57 R58: library part CMP-009-00023-5, "Chip Resistor, 100 KOhm, +/- 1%, 0.1 W, -55 to 155 degC, 0603 (1608 Metric)", Case/Package=0603, Max Operating Temperature=155°C, Min Operating Temperature=-55°C, Power=100mW, Tolerance=1%, Voltage Rating=50V, Mounting Technology=SM, Pins=2, RoHS Compliant=True
R22 R23 R24 R25 R30 R42 R62: library part CMP-009-00017-5, "Chip Resistor, 10 KOhm, +/- 1%, 01 W, -55 to 155 degC, 0603 (1608 Metric)", Case/Package=0603, Max Operating Temperature=155°C, Min Operating Temperature=-55°C, Power=100mW, Tolerance=1%, Voltage Rating=50V, Mounting Technology=SM, Pins=2, RoHS Compliant=True
R40 R41 R60 R61: library part CMP-009-00014-5, "Chip Resistor, 1 KOhm, +/-1%, 0.1 W, -55 to 155 degC, 0603 (1608 Metric)", Case/Package=0603, Max Operating Temperature=155°C, Min Operating Temperature=-55°C, Power=100mW, Tolerance=1%, Voltage Rating=50V, Mounting Technology=SM, Pins=2, RoHS Compliant=True
S1 S2: "Sicherung", Text Field1=Strom
U1: Package=None, Availability=Unavailable, MF="{'manufacturer': u'Diodes Incorporated'}", MP=AP64501SP-13, Price=None
U2 U3: "High-Efficiency 28V 3A 450kHz Synchronous Step-Down Converter In SOT583 Package", Manufacturer_Name="Monolithic Power Systems", Copyright="Copyright (C) 2025 Ultra Librarian. All rights reserved.", Datasheet=https://www.monolithicpower.com/en/documentview/productdocument/index/version/2/document_type/Datasheet/lang/en/sku/MP2338GTL, Manufacturer_Part_Number=MP2338GTL-Z, RefDes=RefDes, Type=Type
U5: "17V Clamp 5A (8/20Âµs) Ipp Tvs Diode Surface Mount SOT-666", Package="SOT-666 STMicroelectronics", Check_prices=https://www.snapeda.com/parts/USBLC6-2P6/STMicroelectronics/view-part/?ref=eda, MF=STMicroelectronics, MP=USBLC6-2P6, SnapEDA_Link=https://www.snapeda.com/parts/USBLC6-2P6/STMicroelectronics/view-part/?ref=snap
U6 U7: library part CMP-00572-88252432-3, "Driver 2.5A 4-OUT Hi/Lo Side Full Brdg/Half Brdg Inv/Non-Inv Automotive 20-Pin SOIC W Tube", Ambient Temperature Range High=85°C, Case/Package=SOIC, Manufacturer Lifecycle Status=ACTIVE, Max Junction Temperature (Tj)=125°C, Max Output Current=2.5A, Max Power Dissipation=440mW, Max Supply Current=15.5mA, Max Supply Voltage=15V, Min Operating Temperature=-40°C, Min Supply Voltage=9.5V, Output Voltage=80V, Switching Frequency=1MHz, ComponentLink1Description="Manufacturer's Website", ComponentLink1URL=http://www.renesas.com, ComponentLink2Description="Datasheet URL", ComponentLink2URL=https://octopart.com/cad-content/api/get-model-datasheet/15189/88252432, ComponentLink3Description="Manufacturer's Package Drawing", ComponentLink3URL=https://www.renesas.com/en/document/psc/package-drawing-soicw-20pin-m203?r=571616, Export Control Classification Number (ECCN) Code=EAR99, Fall Time=10ns, Height=0m, HelpURL=https://octopart.com/cad-content/api/get-model-datasheet/15189/88252432, Lead Free="Lead Free", Length=12.9mm, Lifecycle Status=Production, Max Operating Temperature=85°C, Mount="Surface Mount", Number of Channels=4, Number of Drivers=4, Number of Outputs=4, Number of Pins=20, Output Current=2.5A, Overload Protection="Under Voltage", Packaging=Bulk, Pitch=1.3mm, Power Dissipation=440mW, Propagation Delay=30ns, RAM Size=32kB, REACH SVHC=No, Rise Time=10ns, RoHS=Compliant, Width=7.5mm
U6 U7 U8 U9 U10 U11: "Single Power Supply BUFFER Logic Level Shifter (no enable)", Package="SOT-23-5 Texas Instruments", Check_prices=https://www.snapeda.com/parts/SN74LV1T34DBVR/Texas+Instruments/view-part/?ref=eda, MF="Texas Instruments", MP=SN74LV1T34DBVR, SnapEDA_Link=https://www.snapeda.com/parts/SN74LV1T34DBVR/Texas+Instruments/view-part/?ref=snap
USB-C: "USB CONN, 2.0 TYPE C, RCPT, 16POS, SMT; USB Connector Type:USB Type C; USB Standard:USB 2.0; Gender:Receptacle; No. of Positions:16Positions; Connector Mounting:Surface Mount, Through Hole Mount; Orientation:Right Angle RoHS Compliant: Yes", Package=None, Check_prices=https://www.snapeda.com/parts/USB4105GFA120/Global+Connector+Technology/view-part/?ref=eda, MF="Global Connector Technology", MP=USB4105GFA120, SnapEDA_Link=https://www.snapeda.com/parts/USB4105GFA120/Global+Connector+Technology/view-part/?ref=snap

## Free pads (board coordinates)
  round 1.524 hole 0.762: 2(136.525,24.765) 3(136.525,22.987) 4(136.525,21.209) 5(136.525,19.304) 6(136.525,17.526)
  round 1.524 hole 3.15 paste+6 mask+3: 8(135,5) 8(135,107) 9(35,5) 10(35,68) 11(110,50)

## Via types
v1: diameter 0.711, hole 0.2, Top Layer to Bottom Layer, 988 vias
v2: diameter 0.45, hole 0.2, Top Layer to Bottom Layer, 96 vias
v3: diameter 0.6, hole 0.3, Top Layer to Bottom Layer, 87 vias

## Nets (pads, with @x,y where several pads share a name; then routed paths per layer and width w, separated by ;. In a path a pad name is that pad's centre, name@x,y a point inside that pad or via, vN(x,y) a via of type N, cw(c..) or ccw(c..) an arc to the next point about the centre after c; other vN are vias at no path point)
3V3: 3V3.1 C20.2 C21.2 C22.1 L3.2 R13.2 R15.2 R42.1 R62.1 | length 140.1
  Top Layer w0.3: v2(33.342,90.316) R13.2@36.021,90.316 ; v2@33.383,90.316 33.147,90.552 33.147,94.958 33.323,95.134 33.727,95.134 R15.2@33.977,95.384 ; 3V3.1@43.502,76.346 v2(48.407,76.346) 48.583,76.522 C20.2@48.583,84.982 ; v3(48.387,55.35) 48.411,55.326 98.655,55.326 v3(98.679,55.35) ; v2(48.387,61.854) 48.392,61.849 59.067,61.849 59.098,61.88 59.198,61.88 59.448,62.13 R62.1@59.448,62.23 ; L3.2@49.464,94.126 49.598,94.26 v2(49.598,97.174)
  Bottom Layer w0.3: v2(33.342,90.316) 32.307,90.316 32.131,90.492 32.131,96.998 32.307,97.174 v2(49.598,97.174) ; v3(48.387,55.35) v2(48.387,61.854) ; v2@48.387,61.849 48.397,61.859 48.397,76.336 v2(48.407,76.346) ; v3(98.679,55.35) 98.679,62.137 98.818,62.276 v3(98.818,62.357)
5V: 5V.1 AMS1117-3.3.3 C12.2 C13.2 C14.2 C25.2 DHT11.1 J1.1 J3.1 J5.1 J7.1 J9.1 J11.1 L2.2 R7.1 R9.1 | length 363.2
  Top Layer w0.3: AMS1117-3.3.3@10.531,24.634 10.498,24.667 8.829,24.667 C25.2@8.796,24.7 8.796,23.92 9.475,23.241 v2(29.718,23.241) 29.718,23.306 29.722,23.31 29.722,30.031 29.751,30.06 29.751,36.781 29.448,37.084 DHT11.1@28.034,37.084 ; v2(34.739,111.356) R9.1@34.739,110.37 33.952,110.37 33.777,110.194 33.777,105.224 33.952,105.048 R7.1@36.275,105.048 ; v2(40.962,75.074) 40.962,75.738 ; 5V.1@40.962,76.346 40.962,75.738 ; C12.2@48.837,100.222 51.198,100.222 51.622,99.798 51.622,76.246 51.114,75.738 40.962,75.738 ; L2.2@49.718,108.35 49.979,108.611 v2(49.979,112.414) ; v2(53.34,38.1) 60.485,38.1 J9.1@64.295,34.29 ; 89.687,33.25 ccw(c90.395,33.846) 89.702,33.233 89.775,33.16 89.782,33.153 ccw(c90.395,33.846) 89.789,33.147 ccw(c94.21,38.244) 90.577,32.558 90.651,32.512 90.737,32.512 101.908,32.512 103.686,34.29 J7.1@115.222,34.29 ; 89.687,33.251 J11.1@89.687,33.372 ; J11.1@89.687,33.373 89.688,33.515 J11.1@89.695,34.29
  Bottom Layer w0.3: DHT11.1@28.034,37.084 28.034,74.038 28.21,74.214 41.054,74.214 41.054,38.321 41.275,38.1 v2(53.34,38.1) ; v2(34.739,111.356) 34.739,112.238 34.915,112.414 v2(49.979,112.414) ; 40.962,74.214 v2(40.962,75.074) ; J11.1@89.695,34.29 78.222,34.29 76.825,32.893 64.516,32.893 64.318,33.091 64.318,34.267 J9.1@64.295,34.29 62.39,32.385 J1.1@62.39,2.54 63.165,1.765 63.165,1.446 63.341,1.27 75.682,1.27 76.952,2.54 J3.1@89.06,2.54 89.06,3.97 89.535,4.445 113.665,4.445 J5.1@115.25,2.86
12V: 12V.1 C5.2 C6.2 C7.2 C8.2 C9.2 C15.2 C16.2 C17.2 C46.1 C47.1 C50.1 C51.1 D40.2 D41.2 D50.2 D51.2 L1.2 R2.2 R4.2 R10.1 S2.1 U2.2 U3.2 U6.15 U6.16 U7.15 U7.16 | length 242.9
  Top Layer w0.3: R2.2@14.788,86.252 20.716,86.252 v2(20.722,86.246) ; L1.2@17.594,103.427 L1.2@17.878,103.143 ; 12V.1@38.422,76.346 38.422,75.556 38.458,75.521 ; v3(76.835,64.897) 76.835,67.056 C46.1@77.343,67.564 ; U6.15@104.14,73.789 U6.16@102.87,73.789 v3(102.87,70.993) 112.887,70.993 C50.1@113.03,70.85 ; v3(115.857,64.897) 116.332,65.372 C51.1@116.332,67.574
  Top Layer w0.8: S2.1@24.201,78.878 29.756,78.878 33.114,75.521 38.458,75.521 39.81,74.168 53.372,74.168 53.84,73.699 53.84,71.017 D51.2@54,70.857 54,71.077 54.415,71.492 64.389,71.492 ; U7.16@63.5,73.915 64.135,73.915 ; U7.15@64.77,73.915 64.135,73.915 ; D50.2@76.857,65 77.132,65 79.104,66.972 79.104,71.016 78.636,71.485 74.295,71.485 C47.1@73.66,70.85 73.018,71.492 64.389,71.492 ; 64.135,73.915 64.135,71.746 64.389,71.492
  Top Layer w1: L1.2@17.878,103.143 20.593,103.143 20.769,102.967 v2@20.769,86.252 ; v2(38.789,84.982) C15.2@40.073,84.982
  Bottom Layer w0.3: v3(76.835,64.897) 76.835,63.295 77.011,63.119 114.079,63.119 v3(115.857,64.897) 115.929,64.897 116.183,64.643 118.315,64.643 118.491,64.819 118.491,70.674 118.315,70.85 C50.1@113.03,70.85 C50.1@112.966,70.914 ; v3(93.472,70.914) 93.512,70.953 102.83,70.953 v3(102.87,70.993)
  Bottom Layer w1: S2.1@24.201,78.878 20.945,78.878 20.722,79.101 v2(20.722,86.246) 29.319,86.246 ; v2(38.789,84.982) 38.676,84.982 37.412,86.246 29.319,86.246 ; v2(40.114,103.983) 29.495,103.983 29.319,103.807 29.319,86.246
AHS: C42.1 Q11.5 Q11.6 Q11.7 Q11.8 Q12.5 Q12.6 Q12.7 Q12.8 U6.12 | length 22
  Top Layer w0.3: U6.12@107.95,73.789 107.95,73.089 108.527,72.512 109.635,72.512 110.575,73.452 110.673,73.452 C42.1@110.998,73.777 110.109,74.666 110.109,89.789 v1(109.347,90.551)
  other v1: 97.155,90.551 98.171,90.551 99.187,90.551 100.203,90.551 101.219,90.551 102.235,90.551 103.251,90.551 104.267,90.551 105.283,90.551 106.299,90.551 107.315,90.551 108.331,90.551 97.155,91.567 98.171,91.567 99.187,91.567 100.203,91.567 101.219,91.567 102.235,91.567 103.251,91.567 104.267,91.567 105.283,91.567 106.299,91.567 107.315,91.567 108.331,91.567 109.347,91.567 97.155,92.583 98.171,92.583 99.187,92.583 100.203,92.583 101.219,92.583 102.235,92.583 103.251,92.583 104.267,92.583 105.283,92.583 106.299,92.583 107.315,92.583 108.331,92.583 109.347,92.583 97.155,93.599 98.171,93.599 99.187,93.599 100.203,93.599 101.219,93.599 102.235,93.599 103.251,93.599 104.267,93.599 105.283,93.599 106.299,93.599 107.315,93.599 108.331,93.599 109.347,93.599 97.155,94.615 98.171,94.615 99.187,94.615 100.203,94.615 101.219,94.615 102.235,94.615 103.251,94.615 104.267,94.615 105.283,94.615 106.299,94.615 107.315,94.615 108.331,94.615 109.347,94.615 97.155,95.631 98.171,95.631 99.187,95.631 100.203,95.631 101.219,95.631 102.235,95.631 103.251,95.631 104.267,95.631 105.283,95.631 106.299,95.631 107.315,95.631 108.331,95.631 109.347,95.631 97.155,96.647 98.171,96.647 99.187,96.647 100.203,96.647 101.219,96.647 102.235,96.647 103.251,96.647 104.267,96.647 105.283,96.647 106.299,96.647 107.315,96.647 108.331,96.647 109.347,96.647 97.155,97.663 98.171,97.663 99.187,97.663 100.203,97.663 101.219,97.663 102.235,97.663 103.251,97.663 104.267,97.663 105.283,97.663 106.299,97.663 107.315,97.663 108.331,97.663 109.347,97.663 97.155,98.679 98.171,98.679 99.187,98.679 100.203,98.679 101.219,98.679 102.235,98.679 103.251,98.679 104.267,98.679 105.283,98.679 106.299,98.679 107.315,98.679 108.331,98.679 109.347,98.679 97.155,99.695 98.171,99.695 99.187,99.695 100.203,99.695 101.219,99.695 102.235,99.695 103.251,99.695 104.267,99.695 105.283,99.695 106.299,99.695 107.315,99.695 108.331,99.695 109.347,99.695 97.155,100.711 98.171,100.711 99.187,100.711 100.203,100.711 101.219,100.711 102.235,100.711 103.251,100.711 104.267,100.711 105.283,100.711 106.299,100.711 107.315,100.711 108.331,100.711 109.347,100.711 97.155,101.727 98.171,101.727 99.187,101.727 100.203,101.727 101.219,101.727 102.235,101.727 103.251,101.727 104.267,101.727 105.283,101.727 106.299,101.727 107.315,101.727 108.331,101.727 109.347,101.727 97.155,102.743 98.171,102.743 99.187,102.743 100.203,102.743 101.219,102.743 102.235,102.743 103.251,102.743 104.267,102.743 105.283,102.743 106.299,102.743 107.315,102.743 108.331,102.743 109.347,102.743 97.155,103.759 98.171,103.759 99.187,103.759 100.203,103.759 101.219,103.759 102.235,103.759 103.251,103.759 104.267,103.759 105.283,103.759 106.299,103.759 107.315,103.759 108.331,103.759 109.347,103.759 97.155,104.775 98.171,104.775 99.187,104.775 100.203,104.775 101.219,104.775 102.235,104.775 103.251,104.775 104.267,104.775 105.283,104.775 106.299,104.775 107.315,104.775 108.331,104.775 109.347,104.775 97.155,105.791 98.171,105.791 99.187,105.791 100.203,105.791 101.219,105.791 102.235,105.791 103.251,105.791 104.267,105.791 105.283,105.791 106.299,105.791 107.315,105.791 108.331,105.791 109.347,105.791 97.155,106.807 98.171,106.807 99.187,106.807 100.203,106.807 101.219,106.807 102.235,106.807 103.251,106.807 104.267,106.807 105.283,106.807 106.299,106.807 107.315,106.807 108.331,106.807 109.347,106.807
AHS1: C56.1 Q15.5 Q15.6 Q15.7 Q15.8 Q16.5 Q16.6 Q16.7 Q16.8 U7.12 | length 22.6
  Top Layer w0.3: U7.12@68.58,73.915 68.73,73.765 68.73,72.814 68.906,72.638 70.265,72.638 70.507,72.88 70.507,73.855 70.683,74.031 C56.1@71.501,74.031 71.501,88.265 v1(69.215,90.551)
  other v1: 57.023,90.551 58.039,90.551 59.055,90.551 60.071,90.551 61.087,90.551 62.103,90.551 63.119,90.551 64.135,90.551 65.151,90.551 66.167,90.551 67.183,90.551 68.199,90.551 57.023,91.567 58.039,91.567 59.055,91.567 60.071,91.567 61.087,91.567 62.103,91.567 63.119,91.567 64.135,91.567 65.151,91.567 66.167,91.567 67.183,91.567 68.199,91.567 69.215,91.567 57.023,92.583 58.039,92.583 59.055,92.583 60.071,92.583 61.087,92.583 62.103,92.583 63.119,92.583 64.135,92.583 65.151,92.583 66.167,92.583 67.183,92.583 68.199,92.583 69.215,92.583 57.023,93.599 58.039,93.599 59.055,93.599 60.071,93.599 61.087,93.599 62.103,93.599 63.119,93.599 64.135,93.599 65.151,93.599 66.167,93.599 67.183,93.599 68.199,93.599 69.215,93.599 57.023,94.615 58.039,94.615 59.055,94.615 60.071,94.615 61.087,94.615 62.103,94.615 63.119,94.615 64.135,94.615 65.151,94.615 66.167,94.615 67.183,94.615 68.199,94.615 69.215,94.615 57.023,95.631 58.039,95.631 59.055,95.631 60.071,95.631 61.087,95.631 62.103,95.631 63.119,95.631 64.135,95.631 65.151,95.631 66.167,95.631 67.183,95.631 68.199,95.631 69.215,95.631 57.023,96.647 58.039,96.647 59.055,96.647 60.071,96.647 61.087,96.647 62.103,96.647 63.119,96.647 64.135,96.647 65.151,96.647 66.167,96.647 67.183,96.647 68.199,96.647 69.215,96.647 57.023,97.663 58.039,97.663 59.055,97.663 60.071,97.663 61.087,97.663 62.103,97.663 63.119,97.663 64.135,97.663 65.151,97.663 66.167,97.663 67.183,97.663 68.199,97.663 69.215,97.663 57.023,98.679 58.039,98.679 59.055,98.679 60.071,98.679 61.087,98.679 62.103,98.679 63.119,98.679 64.135,98.679 65.151,98.679 66.167,98.679 67.183,98.679 68.199,98.679 69.215,98.679 57.023,99.695 58.039,99.695 59.055,99.695 60.071,99.695 61.087,99.695 62.103,99.695 63.119,99.695 64.135,99.695 65.151,99.695 66.167,99.695 67.183,99.695 68.199,99.695 69.215,99.695 57.023,100.711 58.039,100.711 59.055,100.711 60.071,100.711 61.087,100.711 62.103,100.711 63.119,100.711 64.135,100.711 65.151,100.711 66.167,100.711 67.183,100.711 68.199,100.711 69.215,100.711 57.023,101.727 58.039,101.727 59.055,101.727 60.071,101.727 61.087,101.727 62.103,101.727 63.119,101.727 64.135,101.727 65.151,101.727 66.167,101.727 67.183,101.727 68.199,101.727 69.215,101.727 57.023,102.743 58.039,102.743 59.055,102.743 60.071,102.743 61.087,102.743 62.103,102.743 63.119,102.743 64.135,102.743 65.151,102.743 66.167,102.743 67.183,102.743 68.199,102.743 69.215,102.743 57.023,103.759 58.039,103.759 59.055,103.759 60.071,103.759 61.087,103.759 62.103,103.759 63.119,103.759 64.135,103.759 65.151,103.759 66.167,103.759 67.183,103.759 68.199,103.759 69.215,103.759 57.023,104.775 58.039,104.775 59.055,104.775 60.071,104.775 61.087,104.775 62.103,104.775 63.119,104.775 64.135,104.775 65.151,104.775 66.167,104.775 67.183,104.775 68.199,104.775 69.215,104.775 57.023,105.791 58.039,105.791 59.055,105.791 60.071,105.791 61.087,105.791 62.103,105.791 63.119,105.791 64.135,105.791 65.151,105.791 66.167,105.791 67.183,105.791 68.199,105.791 69.215,105.791 57.023,106.807 58.039,106.807 59.055,106.807 60.071,106.807 61.087,106.807 62.103,106.807 63.119,106.807 64.135,106.807 65.151,106.807 66.167,106.807 67.183,106.807 68.199,106.807 69.215,106.807
ALS: "Akku Connector.2" C1.1 C2.1 C3.1 C5.1 C6.1 C7.1 C8.1 C9.1 C10.1 C12.1 C13.1 C15.1 C16.1 C17.1 C18.1 C20.1 C21.1 C46.2 C47.2 C50.2 C51.2 GND.1 LED.3 pad.8@135,107 Q12.1 Q12.2 Q12.3 Q13.1 Q13.2 Q13.3 Q16.1 Q16.2 Q16.3 Q18.1 Q18.2 Q18.3 R01.2 R3.2 R5.1 R8.1 R11.2 R14.2 R44.2 R46.2 R54.2 R57.2 U1.7 U1.9 U2.4 U3.4 U6.4@101.6,64.389 U6.14 U6.17 U7.4@62.23,64.515 U7.14 U7.17 | length 369
  Top Layer w0.3: LED.3@2.794,81.661 14.605,81.661 18.542,77.724 R01.2@18.542,75.16 ; GND.1@35.745,76.348 35.745,76.913 35.921,77.089 v2(45.339,77.089) ; R14.2@37.758,95.638 R14.2@37.533,95.638 37.506,95.638 37.256,95.888 37.256,96.298 37.08,96.473 32.846,96.473 32.639,96.266 32.639,89.222 32.815,89.046 37.035,89.046 37.211,88.87 v3(37.211,84.074) 37.258,84.027 41.167,84.027 41.343,84.203 C15.1@41.343,85.058 ; R8.1@38.295,110.37 38.295,111.476 37.913,111.858 33.323,111.858 33.147,111.682 33.147,103.954 33.323,103.778 38.041,103.778 38.549,103.27 38.549,99.206 41.089,99.206 ; R11.2@41.089,95.638 41.089,99.206 ; C9.1@41.735,100.222 41.735,99.952 41.505,99.722 41.413,99.722 41.089,99.398 41.089,99.206 ; v3(45.339,60.775) 61.845,60.775 62.23,61.16 U7.4@62.23,64.515 62.23,68.674 62.406,68.85 C47.2@73.66,68.85 v3(77.307,68.85) C46.2@77.343,68.814 ; v3(55.626,98.933) 55.653,98.906 55.653,98.157 Q16.1@55.68,98.13 Q16.2@55.68,97.48 Q16.3@55.68,96.83 54.9,96.83 54.688,96.618 54.688,96.613 54.075,96 R54.2@53.975,96 53.875,96 52.959,95.084 52.959,80.059 53.135,79.883 61.341,79.883 66.035,75.189 66.035,73.92 U7.14@66.04,73.915 ; v3(85.09,97.516) 85.156,97.45 Q18.1@85.163,97.45 ; v3(85.09,98.298) 85.09,98.173 Q18.2@85.163,98.1 85.156,98.1 85.09,98.034 85.09,97.663 85.25,97.503 85.213,97.503 85.093,97.384 85.093,96.777 v3(85.09,96.774) 85.159,96.774 85.655,97.27 86.751,97.27 86.866,97.384 87.203,97.047 87.581,97.047 87.757,96.871 v2(87.757,75.692) ; v3@85.108,98.316 85.126,98.334 85.126,98.714 Q18.3@85.163,98.75 ; Q12.3@95.504,98.034 95.785,98.034 96.038,97.781 96.038,95.061 95.35,94.373 R44.2@95.25,94.373 95.25,90.424 105.41,80.264 U6.14@105.41,73.789 ; v3(101.6,64.32) U6.4@101.6,64.389 101.6,68.674 101.776,68.85 C50.2@113.03,68.85 116.179,68.85 C51.2@116.332,68.697 ; U6.17@101.6,73.789 v3(101.6,78.994) ; Q13.3@125.295,98.75 Q13.2@125.295,98.1 Q13.1@125.295,97.45 126.071,97.45 ; v3(126.111,96.901) 126.071,96.941 126.071,97.45 ; v3(128.27,78.994) 128.27,96.166 127.293,97.143 R46.2@127.254,97.143 127.154,97.143 126.847,97.45 126.071,97.45
  Top Layer w0.5: v3(95.431,98.1) 95.438,98.1 95.472,98.134 95.472,98.141 95.504,98.173 v3(95.504,100.076)
  Bottom Layer w0.3: v3(45.339,60.775) v2(45.339,77.089) ; v2(62.23,73.914) 62.23,75.516 62.406,75.692 v2(87.757,75.692) ; v3(77.307,68.85) 78.597,68.85 78.867,68.58 78.867,65.073 79.043,64.897 101.023,64.897 v3(101.6,64.32) ; v3(101.6,78.994) v3(128.27,78.994)
  other v2: 7.942,87.141 8.45,87.141 8.958,87.141 9.466,87.141 9.974,87.141 10.482,87.141 8.45,87.649 8.958,87.649 9.466,87.649 9.974,87.649 10.482,87.649 8.45,88.157 8.958,88.157 9.466,88.157 9.974,88.157 10.482,88.157 8.45,88.665 8.958,88.665 9.466,88.665 9.974,88.665 10.482,88.665 8.45,89.173 8.958,89.173 9.466,89.173 9.974,89.173 10.482,89.173 8.45,89.681 8.958,89.681 9.466,89.681 9.974,89.681 10.482,89.681 8.45,90.189 8.958,90.189 9.466,90.189 9.974,90.189 10.482,90.189 8.45,90.697 8.958,90.697 9.466,90.697 9.974,90.697 10.482,90.697 8.45,91.205 8.958,91.205 9.466,91.205 9.974,91.205 10.482,91.205 8.45,91.7 8.958,91.7 9.466,91.7 9.974,91.7 10.482,91.7 8.45,92.856 8.958,92.856 9.466,92.856 9.974,92.856 10.482,92.856
  other v3: 55.626,97.155 125.349,97.155 125.349,97.917 55.626,98.044 125.349,98.679 95.431,98.75 95.431,99.4